# EAGLE board power_management_board (EAGLE 7.2.0)
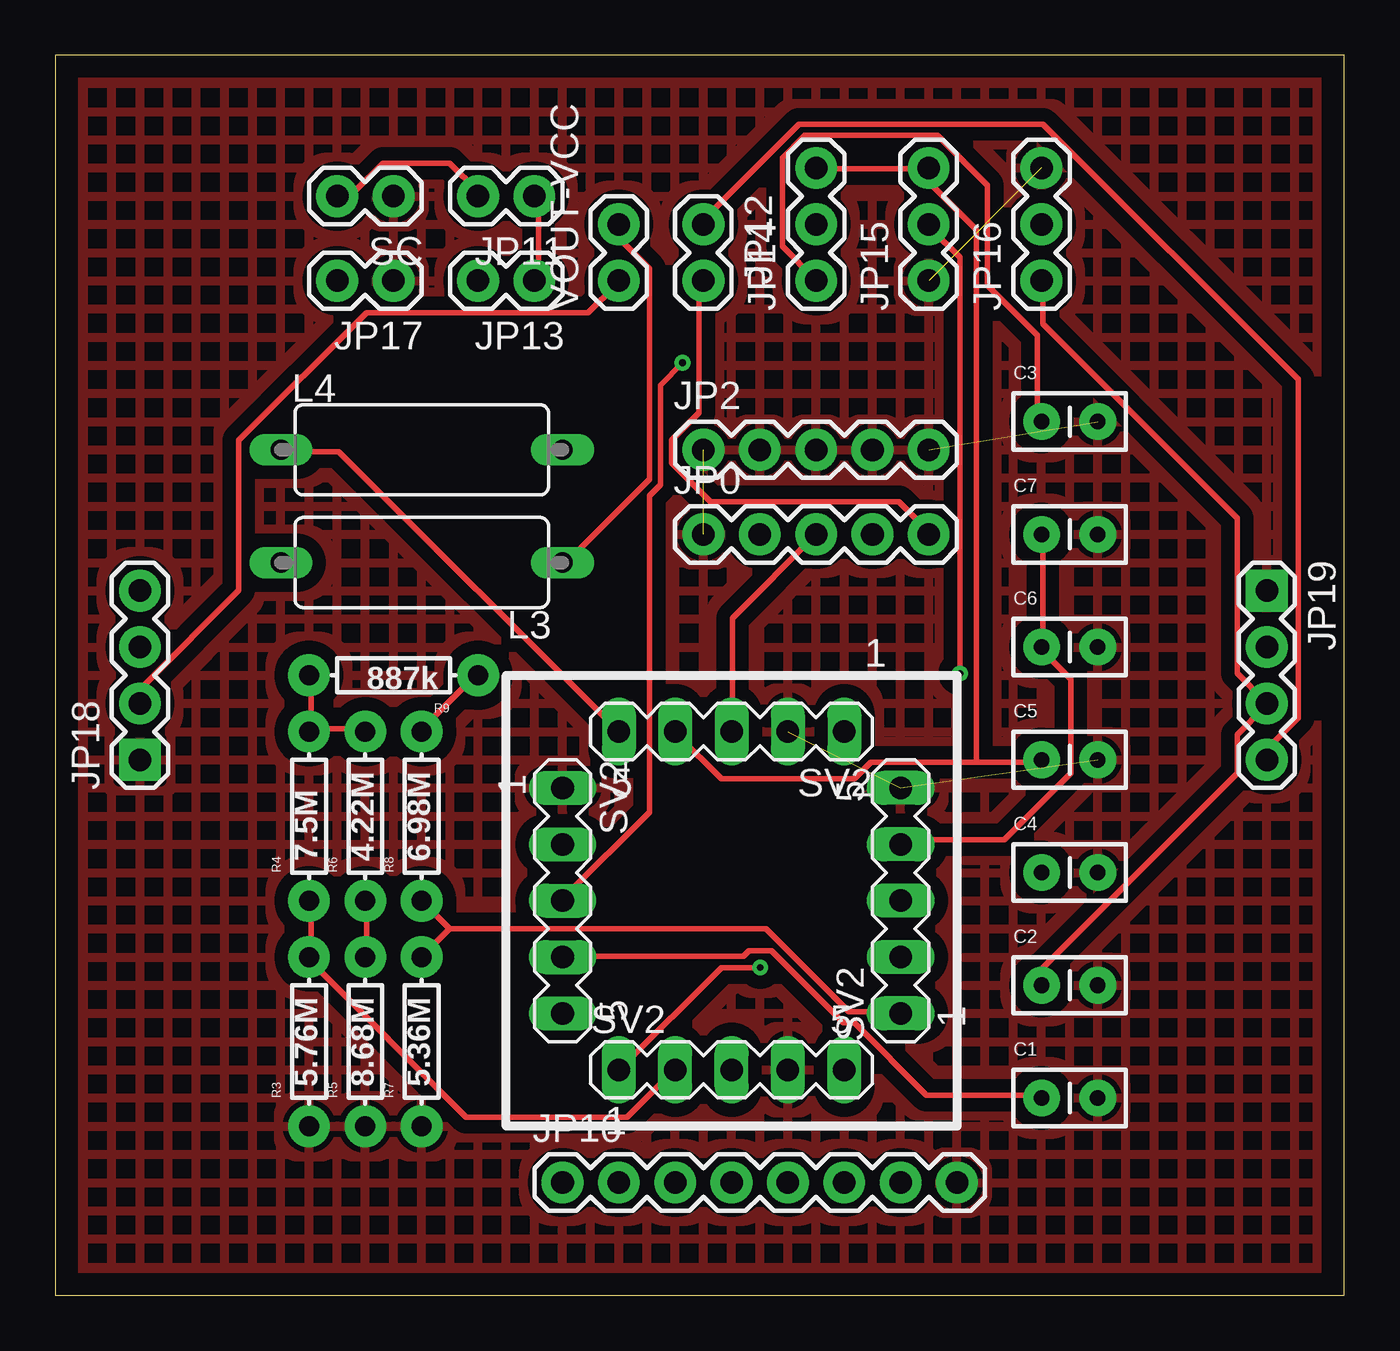
[diagram p0: board, top side]
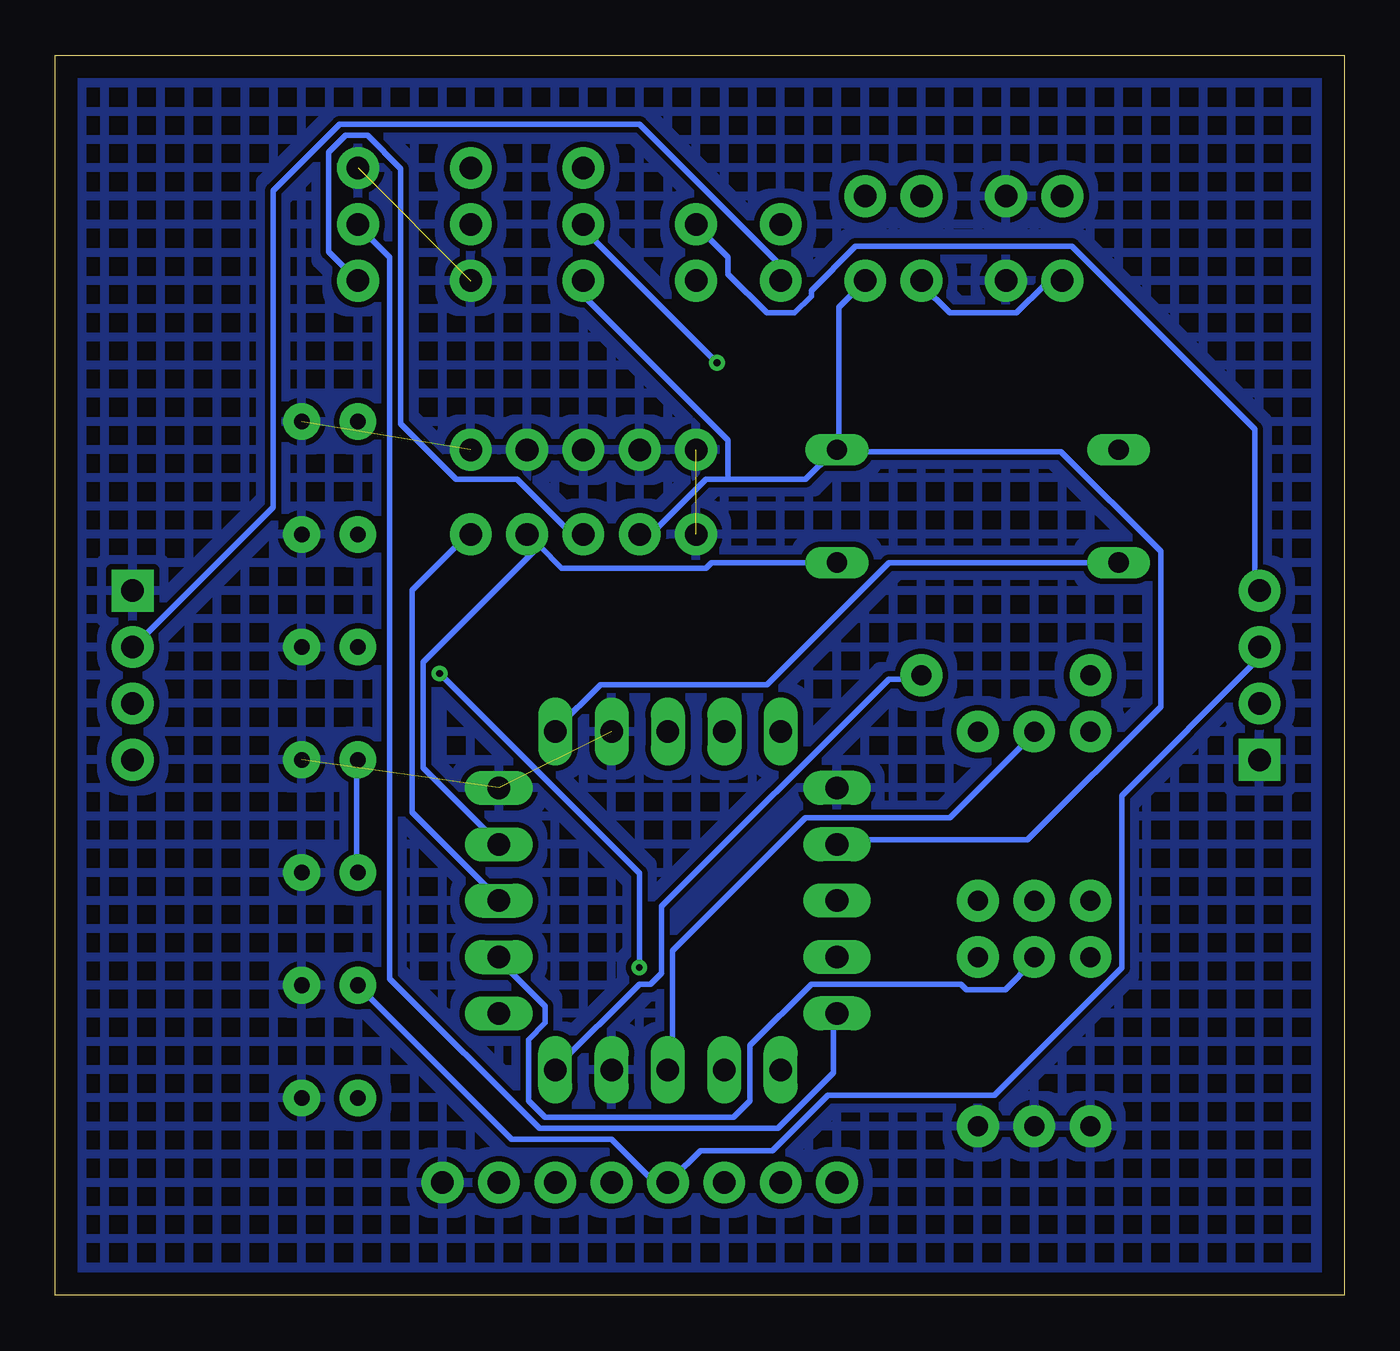
[diagram p1: board, bottom side, seen from below]

Size 58.09 x 55.87 mm. Coordinates in mm from the lower left corner, seen from the top.
Outline: 0,0 58.09,0 58.09,55.87 0,55.87 0,0
Copper layers (1*16): Top 0.035mm / dielectric 1.5mm / Bottom 0.035mm
Design rules "UoM_design_rules *": minimum track width 0.25mm, minimum drill 0.3mm, track to track 0.25mm, track to pad 0.25mm, pad to pad 0.25mm, via to via 0.25mm, smd to smd 8mil, copper to edge 40mil, drill to drill 8mil, minimum pad ring 10mil, minimum via ring 8mil, stop-mask expansion 4mil, vias tented up to drill 0mil, thermal gap 10mil

## Footprints (pad centres in the part's own frame; a part is rotated, then mirrored left to right if it is on the bottom)
CAP-PTH-SMALLEZ = drill 0.7 pad 1.651: 1 0,0; 2 2.54,0
1X05 = drill 1.016 pad 1.88: 1 0,0; 2 2.54,0; 3 5.08,0; 4 7.62,0; 5 10.16,0
1X08_ROUND = drill 1.016 pad 1.88: 1 0,0; 2 2.54,0; 3 5.08,0; 4 7.62,0; 5 10.16,0; 6 12.7,0; 7 15.24,0; 8 17.78,0
1X02 = drill 1.016 pad 1.88: 1 0,0; 2 2.54,0
1X03 = drill 1.016 pad 1.88: 1 0,0; 2 2.54,0; 3 5.08,0
1X04 = drill 1.016 pad 1.88 square: 1 0,0 | drill 1.016 pad 1.88: 2 2.54,0; 3 5.08,0; 4 7.62,0
BC12 = drill 0.914 long: 1 -6.35,0; 2 6.35,0
AXIAL-0.3 = drill 0.9 pad 1.88: P$1 -3.81,0; P$2 3.81,0
MA05-1 = drill 1.016 long: 1 -7.62,5.08; 2 -7.62,2.54; 3 -7.62,0; 4 -7.62,-2.54; 5 -7.62,-5.08; 6 -5.08,-7.62; 7 -2.54,-7.62; 8 0,-7.62; 9 2.54,-7.62; 10 5.08,-7.62; 11 7.62,-5.08; 12 7.62,-2.54; 13 7.62,0; 14 7.62,2.54; 15 7.62,5.08; 16 5.08,7.62; 17 2.54,7.62; 18 0,7.62; 19 -2.54,7.62; 20 -5.08,7.62

## Placement (x,y rotation side)
C1  0.01uF  [CAP-PTH-SMALLEZ]  44.45,8.89 0 top
C2  100uF  [CAP-PTH-SMALLEZ]  44.45,13.97 0 top
C3  4.7uF  [CAP-PTH-SMALLEZ]  44.45,39.37 0 top
C4  4.7uF  [CAP-PTH-SMALLEZ]  44.45,19.05 0 top
C5  0.1uF  [CAP-PTH-SMALLEZ]  44.45,24.13 0 top
C6  22uF  [CAP-PTH-SMALLEZ]  44.45,29.21 0 top
C7  1000uF  [CAP-PTH-SMALLEZ]  44.45,34.29 0 top
JP0  [1X05]  29.21,34.29 0 top
JP2  [1X05]  29.21,38.1 0 top
JP10  [1X08_ROUND]  22.86,5.08 0 top
JP11  SC_EN  [1X02]  21.59,49.53 180 top
JP12  VBAT_OK  [1X02]  29.21,48.26 270 top
JP13  CHRG_EN  [1X02]  21.59,45.72 180 top
JP14  VOC_SAMP  [1X03]  34.29,45.72 90 top
JP15  VOUT_EN  [1X03]  39.37,45.72 90 top
JP16  /EN  [1X03]  44.45,45.72 90 top
JP17  CHRG  [1X02]  15.24,45.72 180 top
JP18  [1X04]  3.81,24.13 90 top
JP19  [1X04]  54.61,31.75 270 top
L3  10uH  [BC12]  16.51,33.02 180 top
L4  22uH  [BC12]  16.51,38.1 0 top
R3  5.76M  [AXIAL-0.3]  11.43,11.43 90 top
R4  7.5M  [AXIAL-0.3]  11.43,21.59 90 top
R5  8.68M  [AXIAL-0.3]  13.97,11.43 90 top
R6  4.22M  [AXIAL-0.3]  13.97,21.59 90 top
R7  5.36M  [AXIAL-0.3]  16.51,11.43 90 top
R8  6.98M  [AXIAL-0.3]  16.51,21.59 90 top
R9  887k  [AXIAL-0.3]  15.24,27.94 180 top
SC  [1X02]  15.24,49.53 180 top
SV2  [MA05-1]  30.48,17.78 0 top
VOUT-VCC  [1X02]  25.4,45.72 90 top

## Library data of the parts
C1-C7 = SparkFun-Capacitors
JP0 JP2 JP10-JP19 SC VOUT-VCC = SparkFun-Connectors
L3 L4 = inductors
R3-R9 = SparkFun-Resistors; PROD_ID: RES-12182
SV2 = bq25570_board; OC_FARNELL: unknown; OC_NEWARK: unknown

## Nets
CHRG: JP13.2 JP17.2
EN: JP16.2 SV2.5
LBOOST: L4.1 SV2.20
LBUCK: L3.2 SV2.16
OK_HYST: R8.P$2 R9.P$1 SV2.10
OK_PROG: R7.P$2 R8.P$1 SV2.11
SC: JP11.2 SC.2
VBAT: C2.1 JP0.3 JP10.4 JP16.1 JP18.3 JP19.3 SV2.18
VBAT_OK: JP0.5 JP12.2 SV2.13
VBAT_OK_IO: JP12.1 JP18.4 JP19.4
VBAT_OV: R3.P$2 R4.P$1 SV2.7
VCC: JP18.2 JP19.2 VOUT-VCC.1
VIN: C3.1 JP0.2 JP11.1 JP13.1 JP14.1 L4.2 SV2.2
VOC_SAMP: JP14.2 SV2.3
VOUT: C6.1 C7.1 JP0.4 L3.1 SV2.14 VOUT-VCC.2
VOUT_EN: JP15.2 SV2.6
VOUT_SET: R5.P$2 R6.P$1 SV2.12
VRDIV: R4.P$2 R6.P$2 R9.P$2 SV2.8
VREF_SAMP: C1.1 SV2.4
VSS: C1.2 C2.2 C3.2 C4.2 C5.2 C6.2 C7.2 JP0.1 JP2.1 JP2.2 JP2.3 JP2.4 JP2.5 JP10.8 JP15.1 JP16.3 JP17.1 JP18.1 JP19.1 R3.P$1 R5.P$1 R7.P$1 SC.1 SV2.1 SV2.9 SV2.15 SV2.17
VSTOR: C4.1 C5.1 JP14.3 JP15.3 SV2.19

## Tracks (layer width: path | path; a pad name or v marks a point on that pad's centre or on a via)
CHRG
  Bottom 0.25: JP17.2 12.77,45.52 13.52,45.52 14.77,44.27 17.77,44.27 19.02,45.52 JP13.2
EN
  Bottom 0.25: SV2.5 23.02,12.52 23.02,10.02 25.52,7.52 36.27,7.52 43.02,14.27 43.02,46.77 44.27,48.02 JP16.2
LBOOST
  Top 0.25: L4.1 10.27,38.02 12.77,38.02 25.27,25.52 SV2.20
LBUCK
  Bottom 0.25: L3.2 20.52,33.02 26.02,27.52 33.52,27.52 35.52,25.52 SV2.16
OK_HYST
  Top 0.25: R8.P$2 16.52,25.52 19.02,28.02 R9.P$1
  Bottom 0.25: SV2.10 35.52,10.27 31.77,14.02 31.27,14.02 30.77,14.52 30.77,17.52 20.52,27.77 19.27,27.77 R9.P$1
OK_PROG
  Top 0.25: 17.77,16.52 32.02,16.52 35.77,12.77 38.02,12.77 SV2.11 | R8.P$1 17.77,16.52 | 17.77,16.52 16.52,15.27 R7.P$2
SC
  Top 0.25: SC.2 12.77,49.77 13.52,49.77 14.77,51.02 17.77,51.02 19.02,49.77 JP11.2
VBAT
  Top 0.25: JP0.3 30.52,30.52 30.52,25.52 SV2.18 | C2.1 44.52,14.02 44.52,14.77 53.27,23.52 53.27,25.27 54.52,26.52 JP19.3 54.52,26.77 53.27,28.02 53.27,35.02 44.52,43.77 44.52,45.52 JP16.1
  Bottom 0.25: C2.1 44.27,13.77 37.52,7.02 33.02,7.02 31.27,5.27 30.52,5.27 JP10.4 30.27,5.27 29.02,6.52 25.77,6.52 23.27,9.02 15.77,9.02 10.02,14.77 10.02,22.52 4.02,28.52 4.02,29.02 JP18.3 | JP0.3 34.52,34.52 35.02,34.52 37.27,36.77 40.02,36.77 42.52,39.27 42.52,50.77 44.02,52.27 45.02,52.27 45.77,51.52 45.77,47.02 44.52,45.77 JP16.1
VBAT_OK
  Top 0.25: JP12.2 29.02,45.52 29.02,39.77 27.77,38.52 27.77,37.52 29.52,35.77 38.02,35.77 39.27,34.52 JP0.5
  Bottom 0.25: SV2.13 38.27,18.02 42.02,21.77 42.02,31.77 39.52,34.27 JP0.5
VBAT_OK_IO
  Top 0.25: JP19.4 54.77,24.27 54.77,24.77 56.02,26.02 56.02,41.27 44.52,52.77 33.52,52.77 29.02,48.27 JP12.1
  Bottom 0.25: JP18.4 4.02,31.77 4.02,39.02 12.27,47.27 22.02,47.27 24.02,45.27 24.02,45.02 24.77,44.27 26.02,44.27 27.77,46.02 27.77,46.77 29.02,48.02 JP12.1
VBAT_OV
  Top 0.25: SV2.7 27.77,10.02 25.77,8.02 18.52,8.02 11.52,15.02 R3.P$2 11.52,15.27 11.52,17.77 R4.P$1
VCC
  Top 0.25: JP18.2 4.02,26.77 4.02,27.52 8.27,31.77 8.27,38.52 14.02,44.27 24.02,44.27 25.27,45.52 VOUT-VCC.1
  Bottom 0.25: JP19.2 54.52,29.27 48.27,35.52 48.27,49.77 45.27,52.77 31.77,52.77 25.52,46.52 25.52,45.77 VOUT-VCC.1
VIN
  Top 0.25: C3.1 44.27,39.52 44.27,43.27 42.02,45.52 42.02,50.02 39.77,52.27 33.77,52.27 32.77,51.27 32.77,47.27 34.27,45.77 JP14.1 | JP11.1 21.77,49.52 21.77,45.77 JP13.1
  Bottom 0.25: L4.2 22.77,38.27 22.77,44.52 21.77,45.52 JP13.1 | SV2.2 22.77,20.52 14.27,20.52 8.27,26.52 8.27,33.52 12.77,38.02 22.77,38.02 L4.2 | 27.77,36.77 24.27,36.77 23.02,38.02 L4.2 | 27.77,36.77 28.77,36.77 31.02,34.52 31.52,34.52 JP0.2 | 27.77,36.77 27.77,38.52 34.27,45.02 34.27,45.52 JP14.1
VOC_SAMP  (via drill 0.3)
  Top 0.25: v28.27,42.02 27.27,41.02 27.27,36.52 26.77,36.02 26.77,21.77 23.02,18.02 SV2.3
  Bottom 0.25: v28.27,42.02 34.27,48.02 JP14.2
VOUT
  Top 0.25: SV2.14 38.27,20.52 42.77,20.52 45.77,23.52 45.77,27.77 44.52,29.02 C6.1 44.52,29.27 44.52,34.27 C7.1 | VOUT-VCC.2 25.52,48.02 25.52,47.52 26.77,46.27 26.77,36.77 23.02,33.02 L3.1
  Bottom 0.25: L3.1 28.52,33.02 28.77,32.77 35.27,32.77 36.27,33.77 | 36.27,33.77 36.77,34.27 JP0.4 36.27,33.77 | 36.27,33.77 41.52,28.52 41.52,23.77 38.27,20.52 SV2.14
VOUT_EN  (via drill 0.3)
  Top 0.25: v31.77,14.77 30.02,14.77 25.52,10.27 SV2.6 | v40.77,28.02 40.77,46.77 39.52,48.02 JP15.2
  Bottom 0.25: v31.77,14.77 31.77,19.02 v40.77,28.02
VOUT_SET
  Top 0.25: R6.P$1 14.02,17.77 14.02,15.27 R5.P$2
  Bottom 0.25: SV2.12 38.02,15.02 36.02,13.02 36.02,12.27 36.77,11.52 36.77,8.77 36.02,8.02 27.52,8.02 26.77,8.77 26.77,11.27 24.02,14.02 17.27,14.02 17.02,13.77 15.27,13.77 14.02,15.02 R5.P$2
VRDIV
  Top 0.25: 11.52,25.52 11.52,27.77 R9.P$2 | 11.52,25.52 13.77,25.52 R6.P$2 | 11.52,25.52 R4.P$2
  Bottom 0.25: SV2.8 30.27,10.27 30.27,15.52 24.27,21.52 17.77,21.52 14.02,25.27 R6.P$2
VREF_SAMP
  Top 0.25: SV2.4 23.02,15.27 31.02,15.27 31.27,15.52 32.27,15.52 35.52,12.27 36.02,12.27 39.27,9.02 44.27,9.02 C1.1
VSS  (5 unrouted)
  pour Top (isolate 0.61, hatched): -5.08,-6.35 72.39,-11.43 72.39,74.93 -5.08,54.61
  pour Bottom (hatched): -10.16,59.69 -11.43,-3.81 66.04,-7.62 64.77,57.15
VSTOR
  Top 0.25: JP14.3 34.52,50.77 39.27,50.77 JP15.3 39.52,50.77 39.52,50.02 41.52,48.02 41.52,24.02 | 41.52,24.02 44.27,24.02 C5.1 | 41.52,24.02 36.77,24.02 36.02,23.27 30.02,23.27 28.02,25.27 SV2.19
  Bottom 0.25: C4.1 44.52,19.27 44.52,24.02 C5.1